# Altium PCB PCB1.PcbDoc
Units mm, origin at the board's own origin, x right, y up, seen from the top; angles counter-clockwise.
Board outline 51.76 x 42.26 mm, 4 copper layers (Top Layer, Int1 (GND), Int2 (PWR), Bottom Layer), stack 1.585 mm thick; 40 components, 26 nets, 171 pads, 124 vias.
Unrouted connection lines stored in the file: 1.
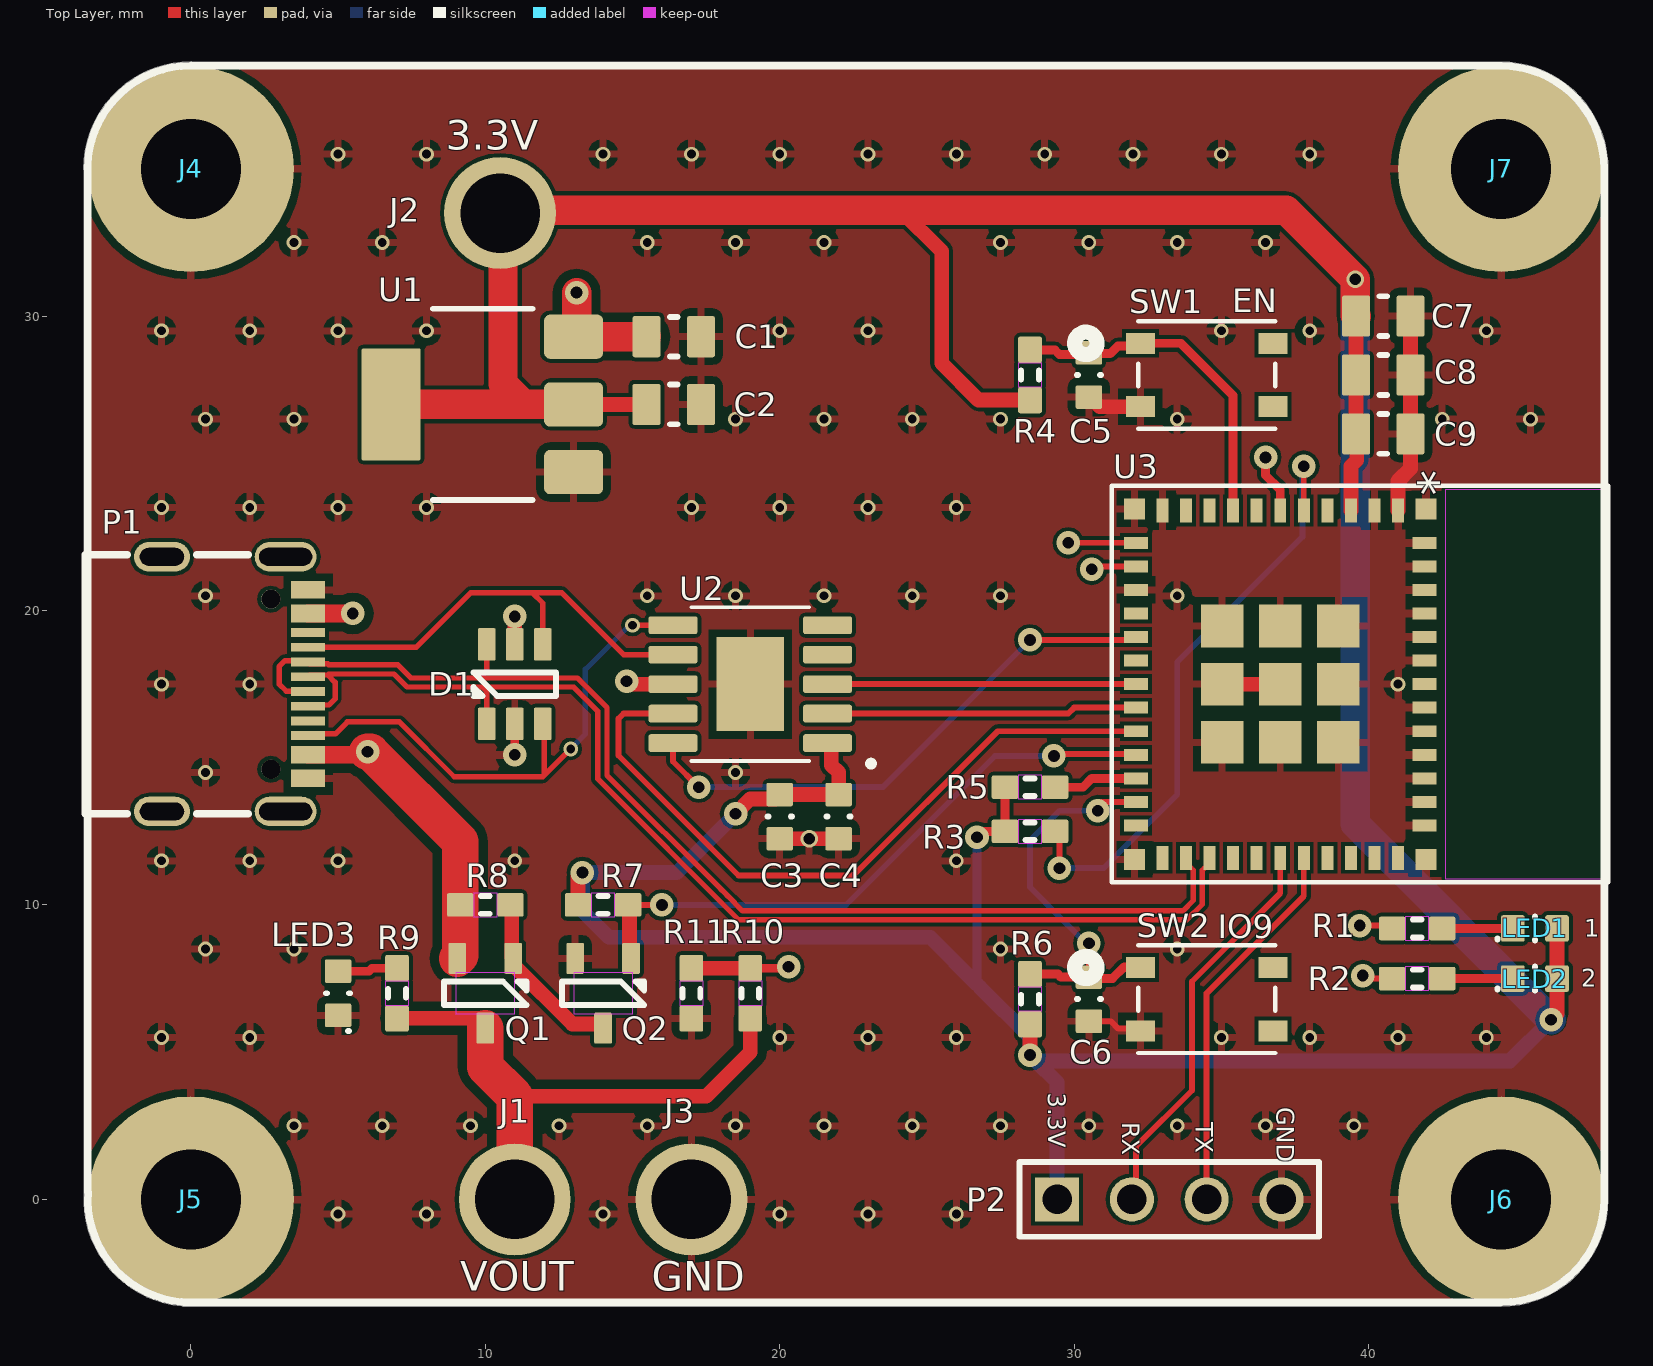
[diagram p0: Top Layer view]
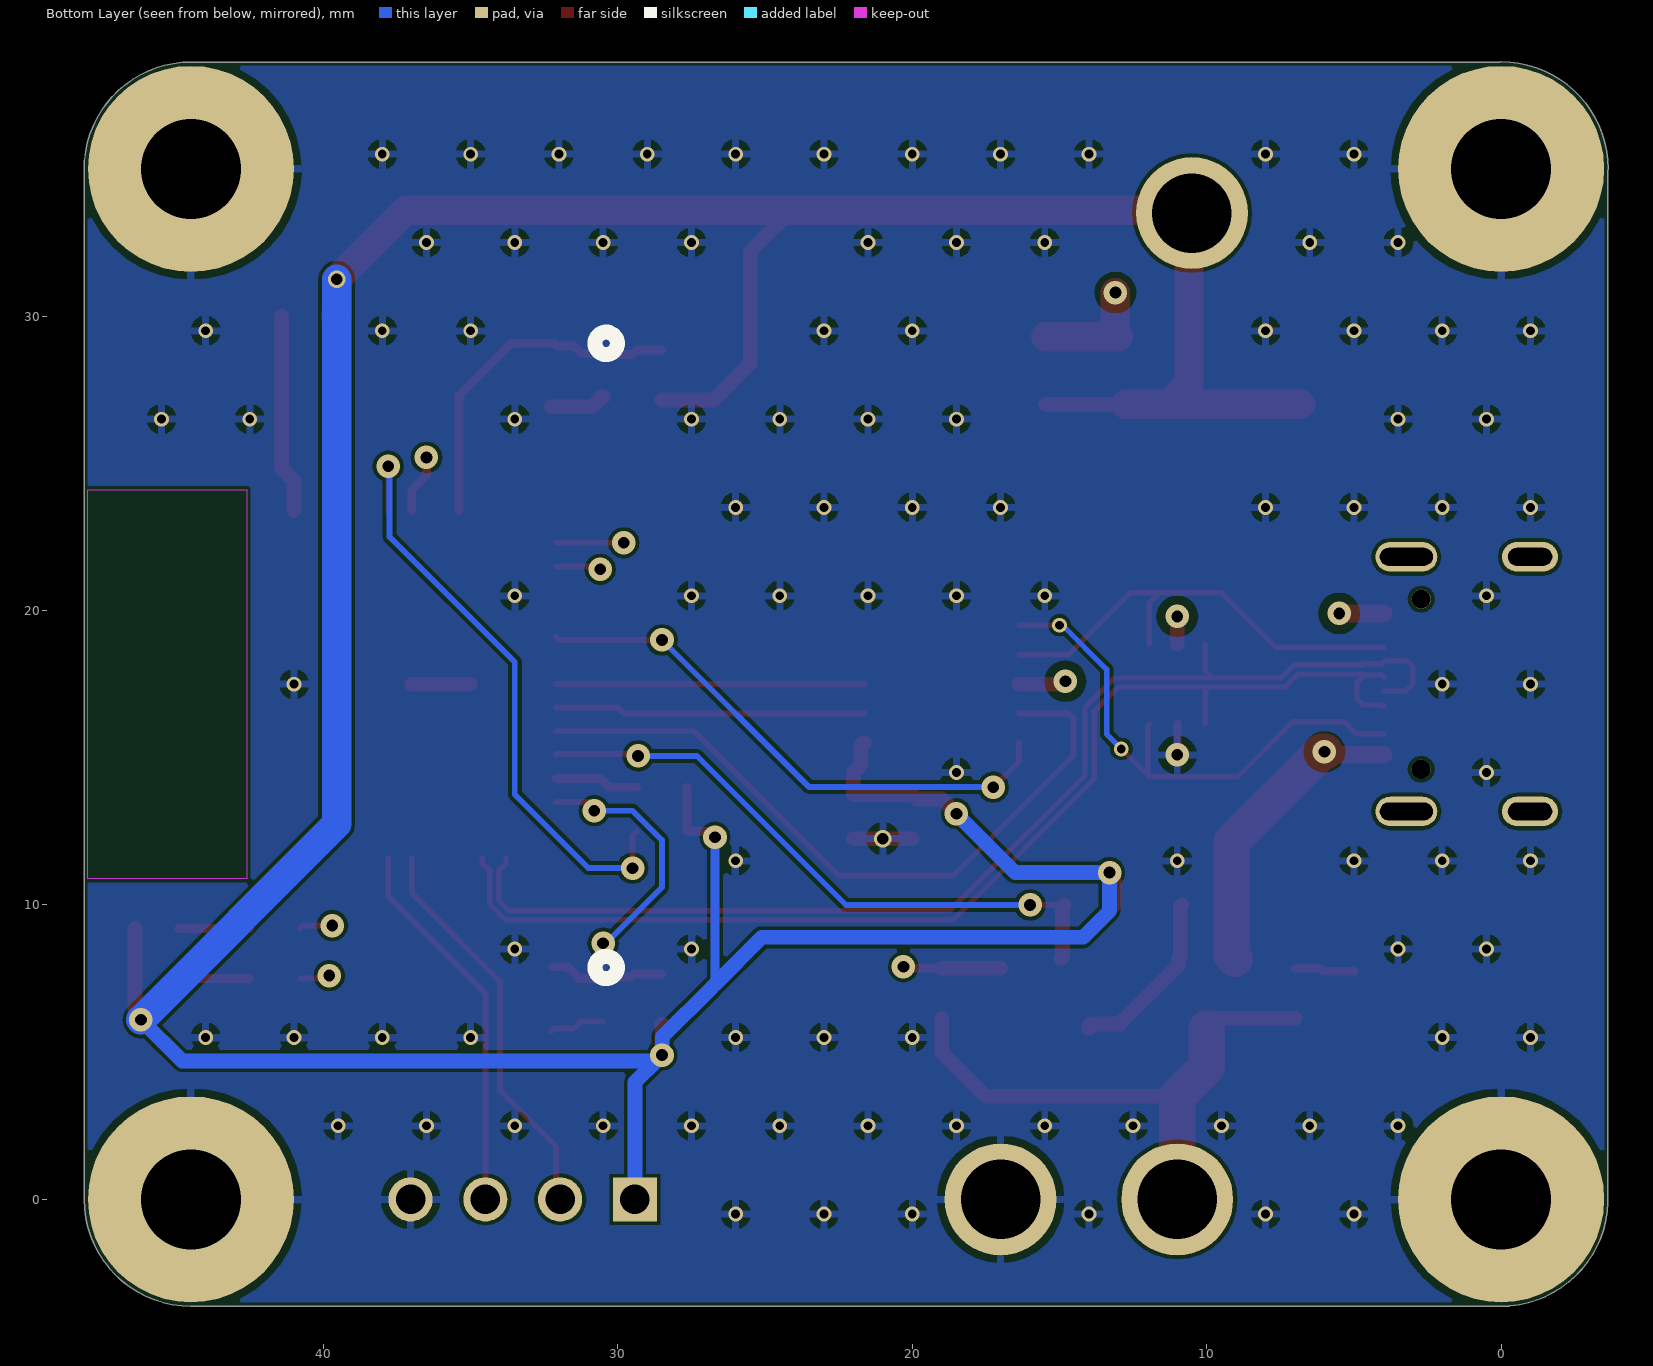
[diagram p1: Bottom Layer view, seen from below]
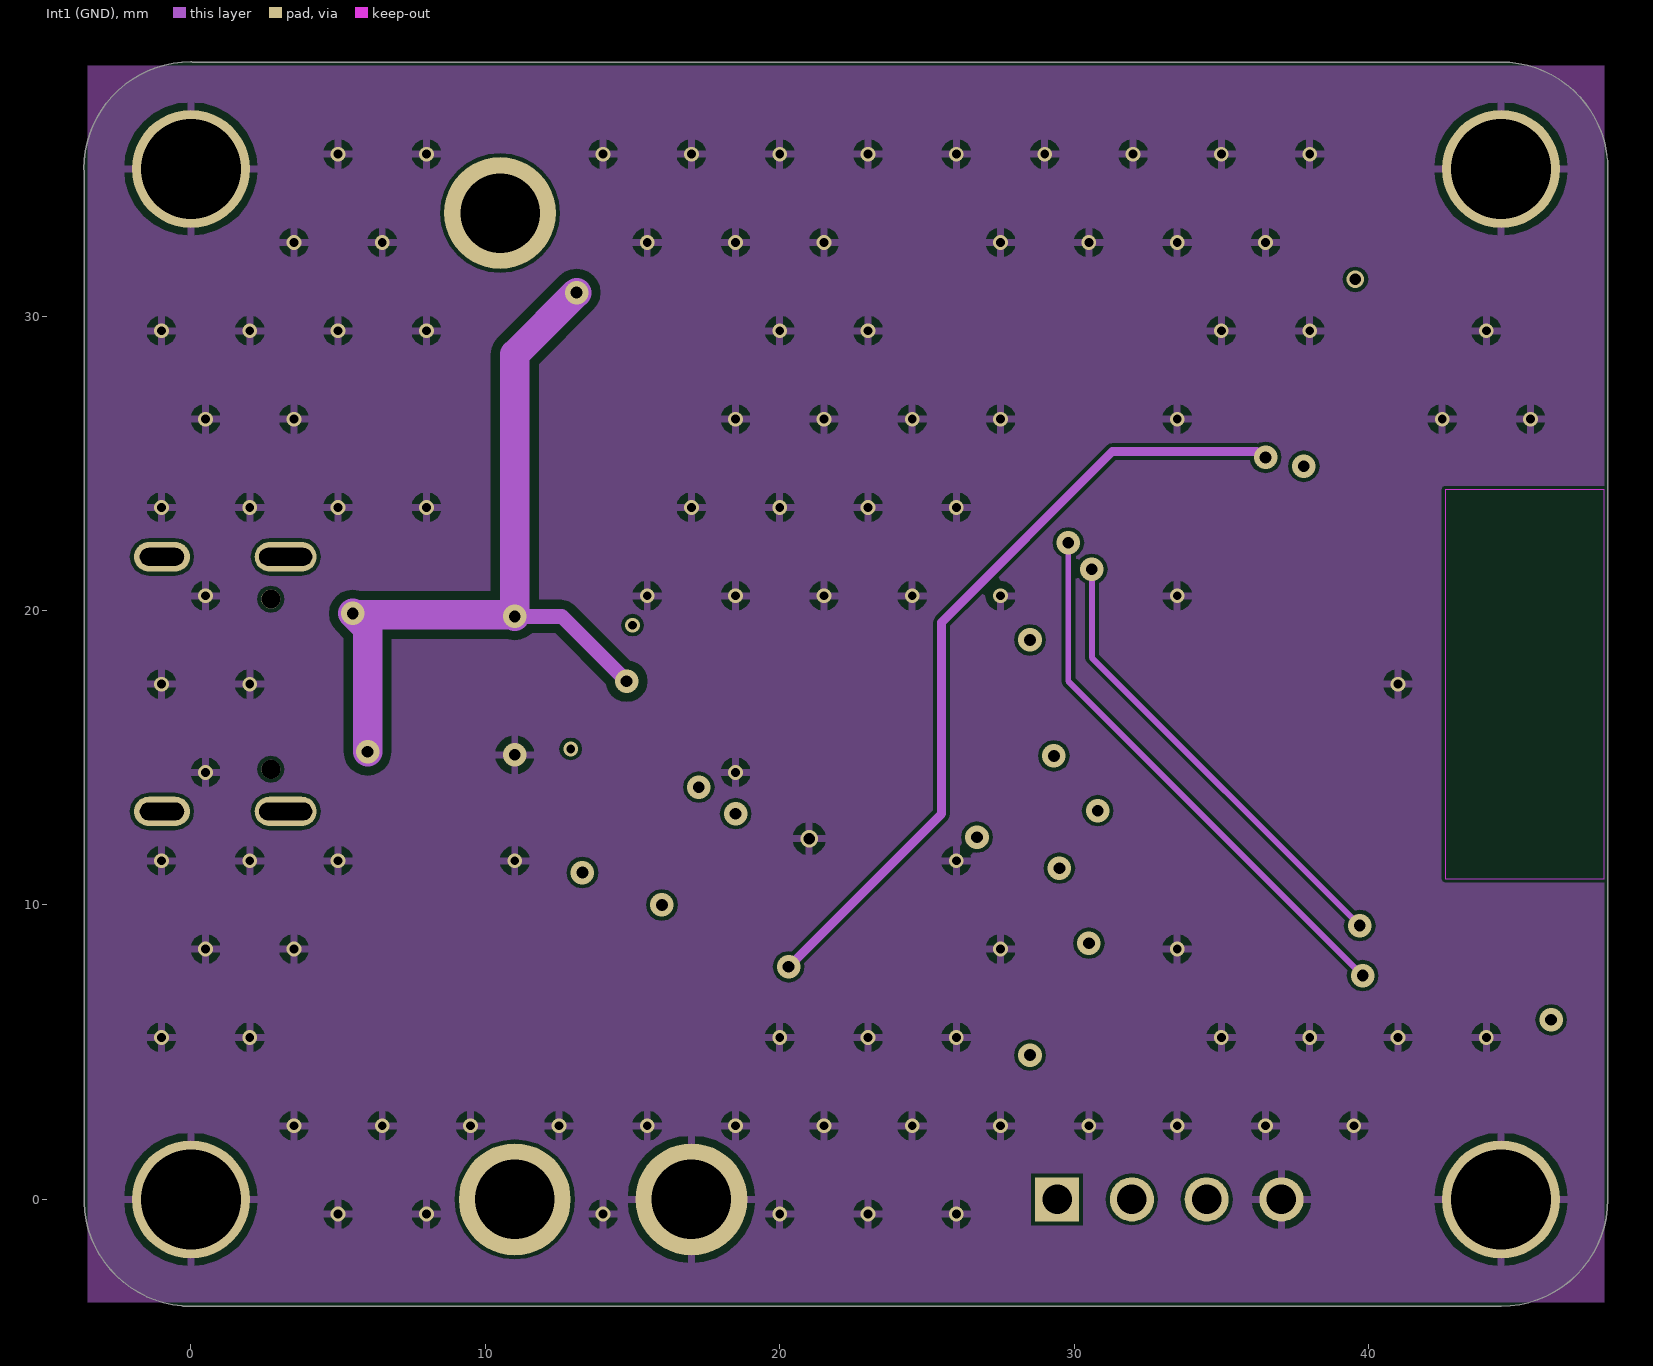
[diagram p2: Int1 (GND)]
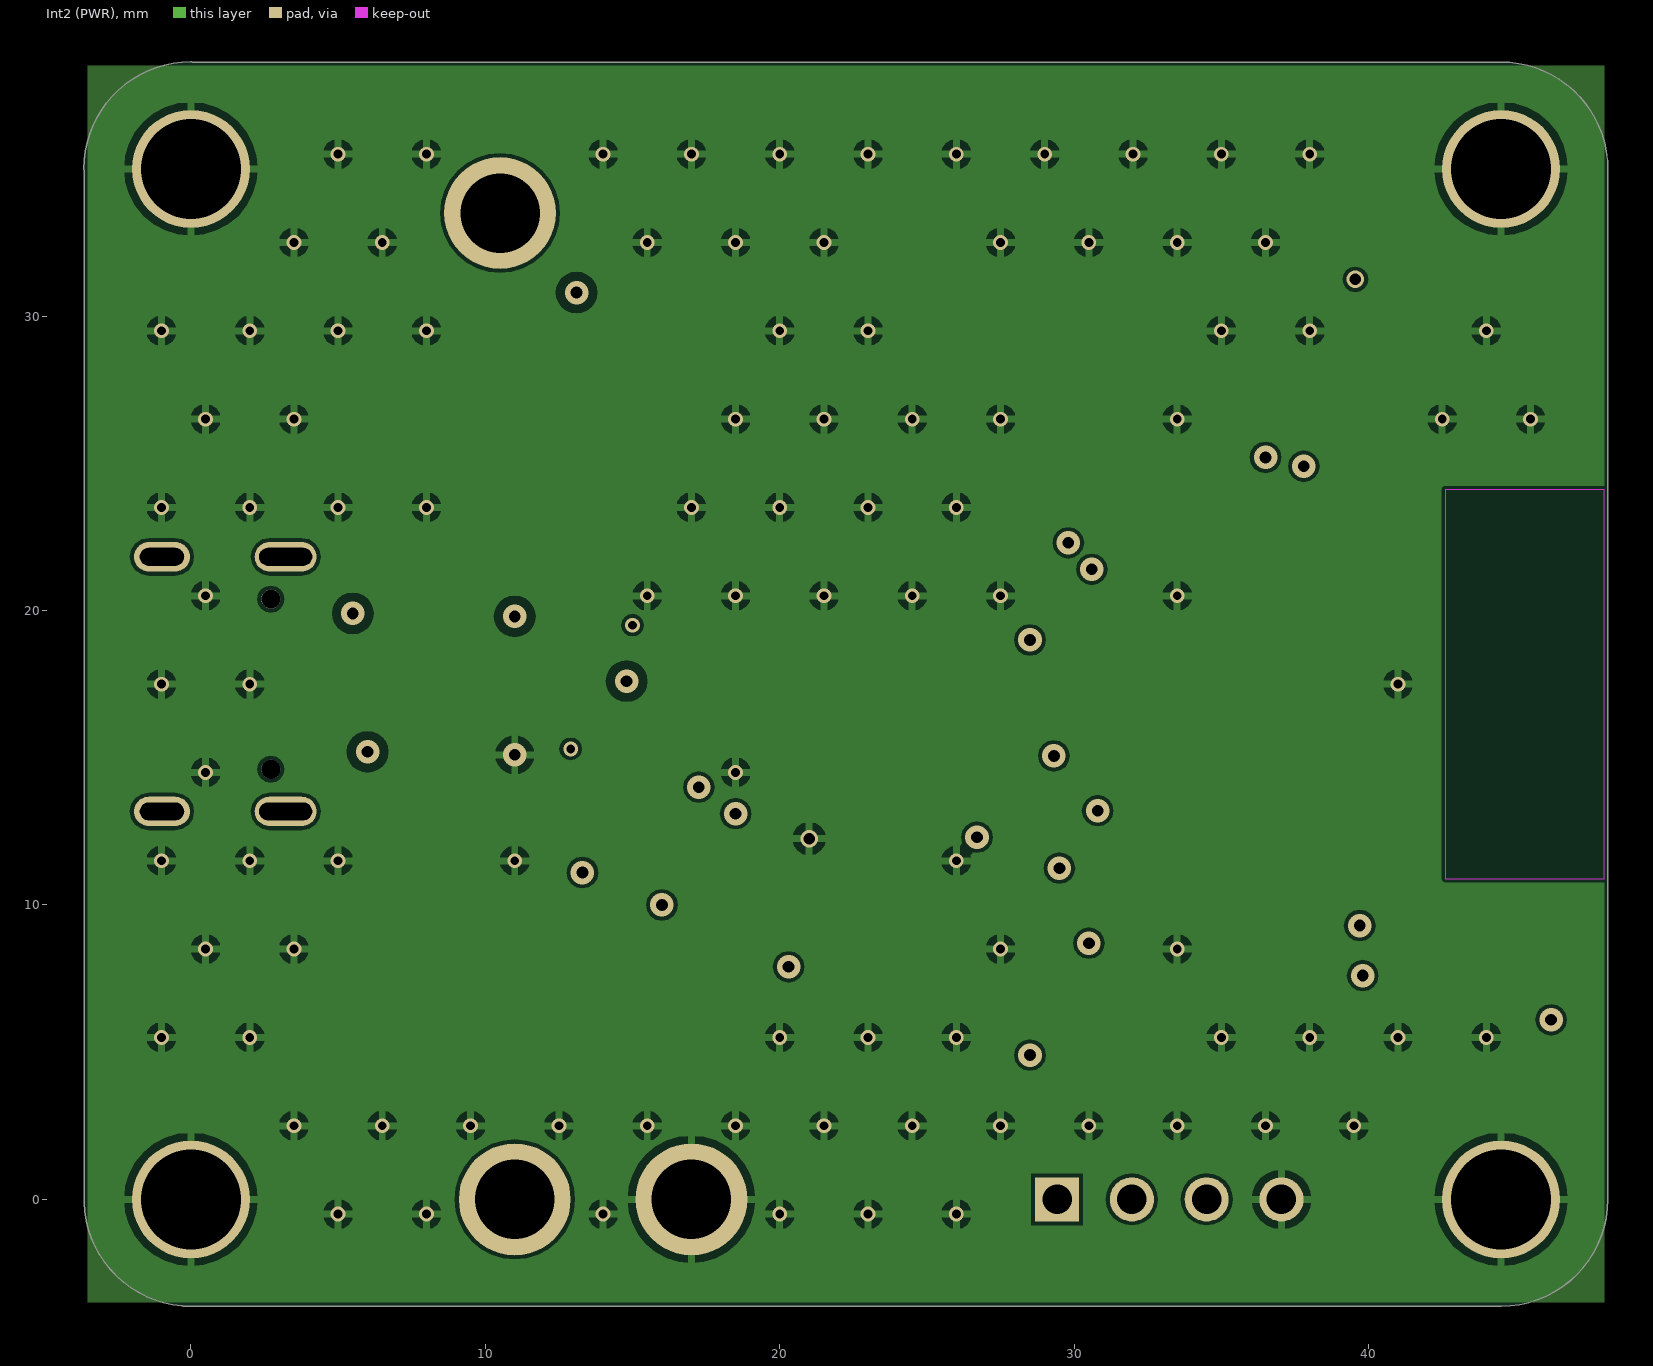
[diagram p3: Int2 (PWR)]
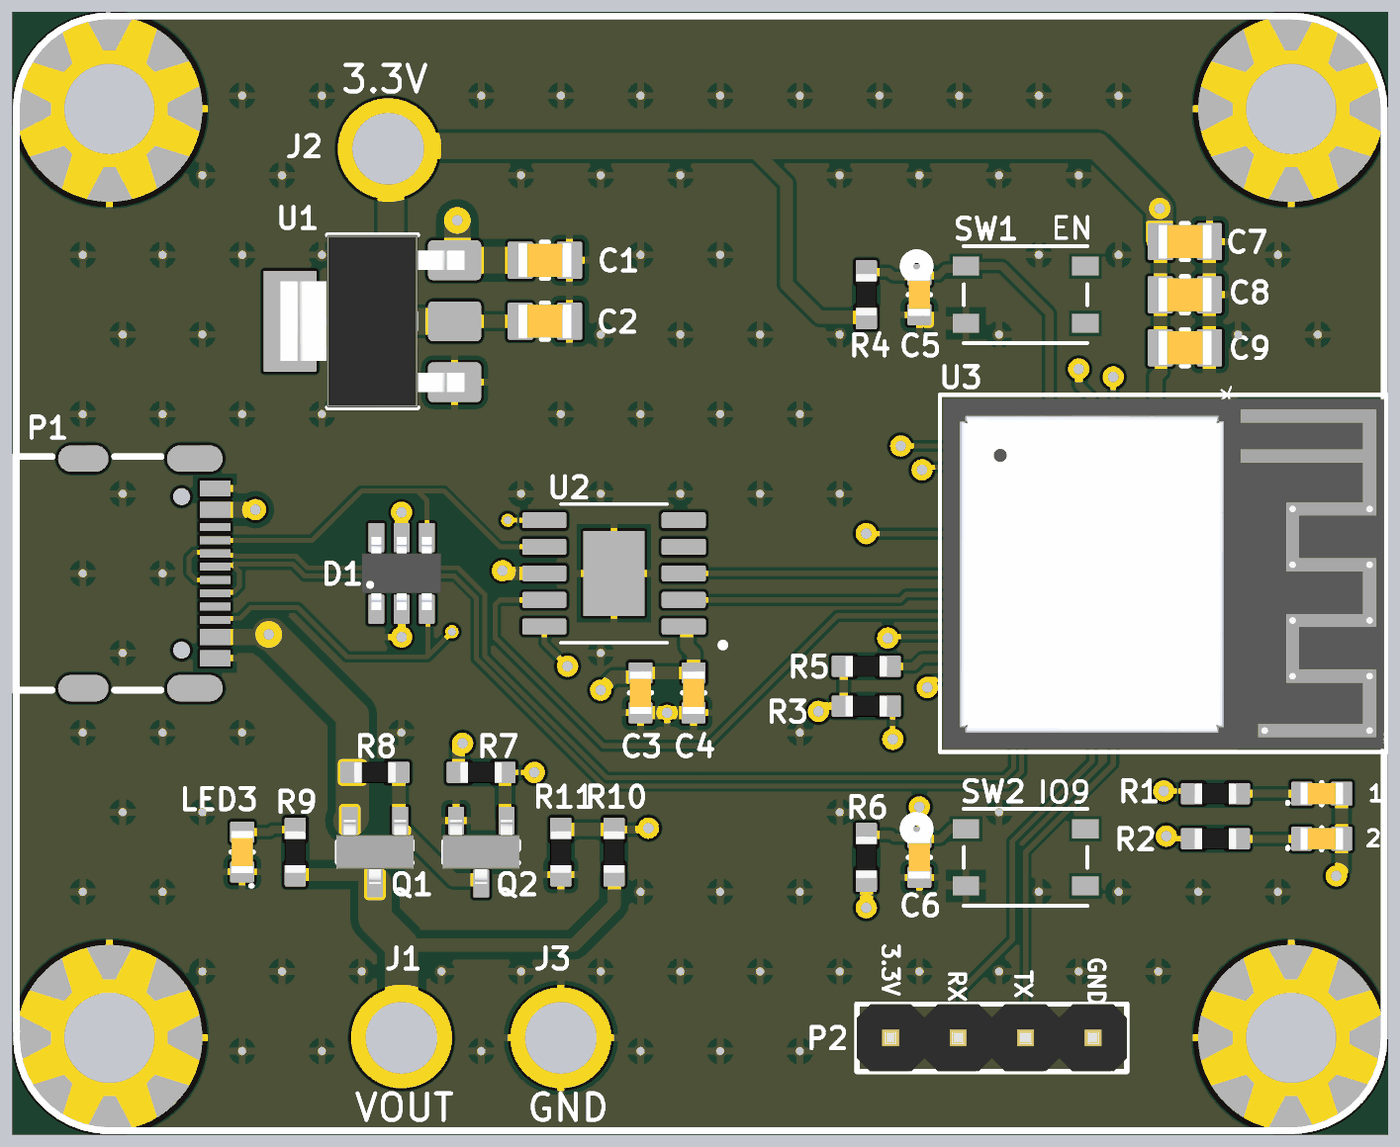
[diagram p4: 3D render of the assembled board from above, using the file's embedded part models]

## Layer stack, top to bottom
Top Solder: solder mask 0.035, SM-001, Dk 4
Top Layer: signal copper 0.035
Dielectric 2: prepreg 0.21, PP-017, Dk 4.6
Int1 (GND): signal copper 0.015
Dielectric 3: core 1.065, Core-039, Dk 4.6
Int2 (PWR): signal copper 0.015
Dielectric 4: prepreg 0.21, PP-017, Dk 4.6
Bottom Layer: signal copper 0.035
Bottom Solder: solder mask 0.035, SM-001, Dk 4

## Board outline
-0.306,-3.614 cw(c0,0) -3.621,0.21 cw(c-3.5,0.249) -3.627,0.249 -3.627,34.953 cw(c-3.509,35) -3.636,35 cw(c0,35) 0,38.636 cw(c0,38.509) 0.047,38.627 44.5,38.627 cw(c44.5,35) 48.127,35 cw(c48,35) 48.127,34.999 48.127,0.001 cw(c48,0) 48.127,0 cw(c44.5,0) 44.501,-3.627 cw(c44.5,0) 44.5,-3.627 ccw(c44.5,-3.5) 44.501,-3.627 44.5,-3.627 -0.25,-3.627 cw(c-0.25,-3.5)

## Design rules (kind name [scope] priority, off if disabled: settings)
Clearance Clearance_USB_C [InComponent('P1')] p1: gap=0.125 ignorepadtopadclearanceinfootprint=FALSE
Clearance Clearance_Power [InNetClass('Power')] p2: gap=0.3 ignorepadtopadclearanceinfootprint=FALSE except(0.127: SMDPad-SMDPad SMDPad-THPad SMDPad-Via SMDPad-Fill SMDPad-Poly SMDPad-Region SMDPad-Text SMDPad-Hole THPad-THPad THPad-Via THPad-Fill THPad-Poly THPad-Region THPad-Text THPad-Hole)
Clearance Clearance_signal [All] p3: gap=0.125 ignorepadtopadclearanceinfootprint=FALSE
ComponentClearance [All] p1 off: gap=0.254 collisioncheckmode=3 verticalgap=0.254 showdistances=FALSE
DiffPairsRouting [InDifferentialPair('USB')] p1: maxlimit=0.254 minlimit=0.125 mostfreqgap=0.254 toplayer_maxgap=0.127 toplayer_prefgap=0.127 toplayer_minwidth=0.182 toplayer_maxwidth=0.182 toplayer_prefwidth=0.182 bottomlayer_maxgap=0.127 bottomlayer_prefgap=0.127 bottomlayer_minwidth=0.182 bottomlayer_maxwidth=0.182 bottomlayer_prefwidth=0.182 impedanceprofiledriven=TRUE impedanceprofileid={35B3B325-3187-4826-BD4F-A59BFA412F1A} impedanceprofilevalue=90.000000 maxuncoupledlength=12.7
Height [All] p1 off: minheight=0 maxheight=25.4 prefheight=12.7
HoleSize [All] p1 off: absolutevalues=TRUE maxlimit=2.54 minlimit=0.025 maxpercent=80.000 minpercent=20.000
MinimumSolderMaskSliver [All] p1 off: minsoldermaskwidth=0.254
PasteMaskExpansion [All] p1 off: expansion=0
PolygonConnect PolygonConnect_Power [InNetClass('Power')] p1: connectstyle=Direct reliefconductorwidth=0.254 reliefentries=4 polygonreliefangle="90 Angle" airgapwidth=0.254
PolygonConnect [All] p2: connectstyle=Relief reliefconductorwidth=0.254 reliefentries=4 polygonreliefangle="90 Angle" airgapwidth=0.254
RoomDefinition sheet1 [InComponentClass('sheet1')] p1 off: confinementstyle=ConfineIn formatcopy=TRUE lockcomponents=FALSE outline 139,-14.5 300,-14.5 300,6.5 139,6.5
RoutingVias [All] p1: holewidth=0.3 width=0.5 viastyle="Through Hole" minholewidth=0.15 minwidth=0.25 maxholewidth=1 maxwidth=1.3
SilkToSilkClearance [All] p1 off: silktosilkclearance=0.254
SilkToSolderMaskClearance [IsPad] p1 off: minsilkscreentomaskgap=0.254 clearancetoexposedcopper=TRUE
SolderMaskExpansion [All] p1 off: expansion=0.102 istentingtop=FALSE
Width Width_Power(5A) [InNetClass('Power')] p1: maxlimit=2 minlimit=0.5 preferedwidth=1.25 minimp=50.000000 maximp=50.000000 favimp=50.000000
Width Width_signal [All] p2: maxlimit=1 minlimit=0.1 preferedwidth=0.2 minimp=50.000000 maximp=50.000000 favimp=50.000000
22 further rules are at their usual default settings.

## Classes and differential pairs
net class Power: NetJ1_1 VBUS
differential pair USB: +USB_P -USB_N

## Components (designator, comment, footprint, x,y, rotation, side; value= is the part's Value field where it differs from the comment)
C1 "Capacitor-0805-10uF-35V-X5R" CAPACITOR-0805 16.4,29.3 r180 top value=10uF
C2 "Capacitor-0805-10uF-35V-X5R" CAPACITOR-0805 16.4,27 r180 top value=10uF
C3 "Capacitor-0603-1uF-25V-X5R" CAPACITOR-0603 20,13 r90 top value=1uF
C4 "Capacitor-0603-0.1uF-50V-X7R" CAPACITOR-0603 22,13 r90 top value=0.1uF
C5 "Capacitor-0603-1uF-25V-X5R" CAPACITOR-0603 30.5,28 r90 top value=1uF
C6 "Capacitor-0603-1uF-25V-X5R" CAPACITOR-0603 30.5,6.8 r90 top value=1uF
C7 "Capacitor-0805-10uF-35V-X5R" CAPACITOR-0805 40.5,30 r180 top value=10uF
C8 "Capacitor-0805-10uF-35V-X5R" CAPACITOR-0805 40.5,28 r180 top value=10uF
C9 "Capacitor-0805-10uF-35V-X5R" CAPACITOR-0805 40.5,26 r180 top value=10uF
D1 "NUP4301MR6T1G" SOT-23-6 11,17.5 r0 top
J1 "hole" HOLE-2.70MM 11,0 r0 top
J2 "hole" HOLE-2.70MM 10.5,33.5 r0 top
J3 "hole" HOLE-2.70MM 17,0 r0 top
J4 "hole" HOLE-3.40MM-M3-7MMEYELET-MountingFeature 0,35 r0 top
J5 "hole" HOLE-3.40MM-M3-7MMEYELET-MountingFeature 0,0 r0 top
J6 "hole" HOLE-3.40MM-M3-7MMEYELET-MountingFeature 44.5,0 r0 top
J7 "hole" HOLE-3.40MM-M3-7MMEYELET-MountingFeature 44.5,35 r0 top
LED1 "B1911USD-20D000114U1930" LED-0603-2PIN 45.65,9.2 r0 top
LED2 "B1911USD-20D000114U1930" LED-0603-2PIN 45.65,7.5 r0 top
LED3 "B1911USD-20D000114U1930" LED-0603-2PIN 5,7 r90 top
P1 "USB-C" USB-C 1.5,17.5 r270 top
P2 "UART" HDR1X4 33.23,0 r0 top
Q1 "SSM3J332R" SOT-23-3 10,7 r180 top
Q2 "DMG3402L-7" SOT-23-3 14,7 r180 top
R1 "SMT resistor" Resistor-0603 41.65,9.2 r0 top value=1k
R2 "SMT resistor" Resistor-0603 41.65,7.5 r0 top value=1k
R3 "SMT resistor" Resistor-0603 28.5,12.5 r180 top value=10k
R4 "SMT resistor" Resistor-0603 28.5,28 r270 top value=10k
R5 "SMT resistor" Resistor-0603 28.5,14 r180 top value=10k
R6 "SMT resistor" Resistor-0603 28.5,6.8 r270 top value=10k
R7 "SMT resistor" Resistor-0603 14,10 r180 top value=10k
R8 "SMT resistor" Resistor-0603 10,10 r180 top value=10k
R9 "SMT resistor" Resistor-0603 7,7 r270 top value=1k
R10 "SMT resistor" Resistor-0603 19,7 r270 top value=10k
R11 "SMT resistor" Resistor-0603 17,7 r90 top value=1.69k
SW1 "PTS815 SJM 250 SMTR LFS" "SW4_PTS815 SJM 250 SMTR LFS_CNK" 34.5,28 r90 top
SW2 "PTS815 SJM 250 SMTR LFS" "SW4_PTS815 SJM 250 SMTR LFS_CNK" 34.5,6.8 r90 top
U1 "NCP1117ST15T3G" SOT-223-3/TO-261-3S 13,27 r90 top
U2 "CH224K" SOP10-PAD 19,17.5 r180 top
U3 "ESP32-C3-MINI-1-H4" ESP32-C3-MINI-1_EXP 39.705,17.5 r270 top

## Footprints (in the part's own frame and the unit in brackets; to place one, negate y for a bottom-side part, rotate by r counter-clockwise, add the part's x,y. Pads: shape width x height; smd on the part's side, far side on the other; paste and mask are expansions set on the pad)
CAPACITOR-0603 [mm] "Metric 1608, EIA 0603. Per Yageo Product Specification V2.2"
  rrect15% 0.8x0.9 smd: 1(-0.75,0) 2(0.75,0)
  Top Layer pour cut-out: -0.35,0.45 0.35,0.45 0.35,-0.45 -0.35,-0.45
  silkscreen extent 0,-0.41 0,0.41, body extent -0.93,-0.41 0.93,0.41, height 0.81
CAPACITOR-0805 [mm] "Metric 2012, EIA 0805, Per Yageo Product Specification V2.2"
  rrect15% 0.95x1.4 smd: 1(-0.925,0) 2(0.925,0)
  silkscreen extent -0.13,-0.67 0.13,0.67, body extent -1.09,-0.64 1.09,0.64, height 1.26
ESP32-C3-MINI-1_EXP [mil]
  rect 32x16 smd paste+0 mask+0: 1(-232.28,50.98) 2(-232.28,19.48) 3(-232.28,-12.01) 4(-232.28,-43.51) 5(-232.28,-75) 6(-232.28,-106.5) 7(-232.28,-138) 8(-232.28,-169.49) 9(-232.28,-200.99) 10(-232.28,-232.48) 11(-232.28,-263.98) 25(232.28,-263.98) 26(232.28,-232.48) 27(232.28,-200.99) 28(232.28,-169.49) 29(232.28,-138) 30(232.28,-106.5) 31(232.28,-75) 32(232.28,-43.51) 33(232.28,-12.01) 34(232.28,19.48) 35(232.28,50.98)
  rect 16x32 smd paste+0 mask+0: 12(-188.98,-299.41) 13(-157.48,-299.41) 14(-125.98,-299.41) 15(-94.49,-299.41) 16(-62.99,-299.41) 17(-31.5,-299.41) 18(0,-299.41) 19(31.5,-299.41) 20(62.99,-299.41) 21(94.49,-299.41) 22(125.98,-299.41) 23(157.48,-299.41) 24(188.98,-299.41) 36(188.98,86.41) 37(157.48,86.41) 38(125.98,86.41) 39(94.49,86.41) 40(62.99,86.41) 41(31.5,86.41) 42(0,86.41) 43(-31.5,86.41) 44(-62.99,86.41) 45(-94.49,86.41) 46(-125.98,86.41) 47(-157.48,86.41) 48(-188.98,86.41)
  rect 57x57 smd: 49(0,-106.5) 54(77.76,-28.74) 55(77.76,-106.5) 56(77.76,-184.26) 57(0,-184.26) 58(-77.76,-184.26) 59(-77.76,-106.5) 60(-77.76,-28.74) 61(0,-28.74)
  rect 28x28 smd: 50(234.25,88.38) 51(234.25,-301.38) 52(-234.25,-301.38) 53(-234.25,88.38)
  Keep-Out Layer region: 260,327 -260,327 -260,114 260,114
  silkscreen extent -265,-332 265,332, body extent -259,-327 261,327, height 100
HDR1X4 [mm] "Connector; Header; 2 Position"
  rect 1.5x1.5 hole 1: 1(-3.81,0)
  round 1.5 hole 1: 2(-1.27,0) 3(1.27,0) 4(3.81,0)
  silkscreen extent -5.08,-1.27 5.08,1.27, body extent -5.08,-1.27 5.08,1.27, height 8.54
HOLE-2.70MM [mm] "Hole 2.70mm"
  round 3.8 hole 2.7: 1(0,0)
HOLE-3.40MM-M3-7MMEYELET-MountingFeature [mm] "Hole 3.40mm with round pad for eyelet"
  round 7 / inner round 4 / far side round 7 hole 3.4 mask+0.2: 1(0,0)
LED-0603-2PIN [mm] "Metric 1608, EIA 0603. Per Yageo Product Specification V2.2"
  rrect15% 0.8x0.9 smd: 1(-0.75,0) 2(0.75,0)
  Top Layer pour cut-out: -0.35,0.45 0.35,0.45 0.35,-0.45 -0.35,-0.45
  silkscreen extent -1.28,-0.41 0,0.41, body extent -0.93,-0.41 0.93,0.41, height 0.81
Resistor-0603 [mm] "Metric 1608, EIA 0603 Drawn per Yageo \"Chip resistors Mounting\" rev 10"
  rrect15% 0.9x0.8 smd: 1(-0.85,0) 2(0.85,0)
  Top Layer pour cut-out: -0.4,0.4 0.4,0.4 0.4,-0.4 -0.4,-0.4
  Top Layer keep-out region: -0.4,-0.4 0.4,-0.4 0.4,0.4 -0.4,0.4
  silkscreen extent -0.15,-0.3 0.15,0.3, body extent -0.8,-0.4 0.8,0.4, height 0.55
SOP10-PAD [mm]
  rrect25% 1.66x0.6 smd: 1(-2.625,2) 2(-2.625,1) 3(-2.625,0) 4(-2.625,-1) 5(-2.625,-2) 6(2.625,-2) 7(2.625,-1) 8(2.625,0) 9(2.625,1) 10(2.625,2)
  rect 2.3x3.2 smd: PAD(0,0)
  silkscreen extent -4.2,-2.61 2,2.8
SOT-23-3 [mm] "SOT23-3, from TI DBZ (R-PDSO-G3)"
  rrect15% 0.6x1.05 smd: 1(-0.95,-1.185) 2(0.95,-1.185) 3(0,1.185)
  Top Layer keep-out region: -1,-0.7 1,-0.7 1,0.7 -1,0.7
  silkscreen extent -1.4,-0.4 1.4,0.4, body extent -1.45,-1.21 1.45,1.21, height 0.98
SOT-23-6 [mm] "SOT23-6, from TI DDC (R-PDSO-G6)"
  rrect15% 0.6x1.1 smd: 1(-0.95,-1.35) 2(0,-1.35) 3(0.95,-1.35) 4(0.95,1.35) 5(0,1.35) 6(-0.95,1.35)
  silkscreen extent -1.4,-0.4 1.4,0.4, body extent -1.5,-1.37 1.5,1.38, height 1.1
SOT-223-3/TO-261-3S [mm] "TO-261-3 / SOT-223-3 from Infineon IPN80R600P7 Datasheet, rev 2,1"
  rrect25% 1.5x2 smd: 1(-2.3,0) 2(0,0) 3(2.3,0)
  rrect5% 3.8x2 smd: 4(0,6.2)
  silkscreen extent -3.25,1.4 3.25,4.78, body extent -3.25,-0.37 3.25,6.57, height 1.64
"SW4_PTS815 SJM 250 SMTR LFS_CNK" [mm]
  rect 0.711x0.991 smd paste+0 mask+0: 1(1.075,2.25) 2(1.075,-2.25) 3(-1.075,2.25) 4(-1.075,-2.25)
  silkscreen extent -1.83,-2.32 1.83,4.48, body extent 0,-0.25 0.25,0, height 0.25
USB-C [mm]
  oval 1x2.1 hole 0.6 slot 1.8 at 90 deg: 13(-4.325,1.719) 14(4.325,1.719)
  oval 1x1.9 hole 0.6 slot 1.5 at 90 deg: 15(-4.325,-2.481) 16(4.325,-2.481)
  rect 0.6x1.15 smd: A1B12(-3.2,2.481) A4B9(-2.4,2.481) B1A12(3.2,2.481) B4A9(2.4,2.481)
  rect 0.3x1.15 smd: A5(-1.25,2.481) A6(-0.25,2.481) A7(0.25,2.481) A8(1.25,2.481) B5(1.75,2.481) B6(0.75,2.481) B7(-0.75,2.481) B8(-1.75,2.481)
  round 0.65 hole 0.65 unplated: ""(-2.89,1.219) ""(2.89,1.219)
  silkscreen extent -4.4,-5.08 4.4,0.44

## Part data
C1 C2 C7 C8 C9: Package / Case="Metric 2012 , EIA 0805", Supplier Part Number 1=490-10515-1-ND, Volt=35V, Mounted=Yes, Precision=X5R-10%, Supplier 1=Digi-Key, Supplier 2=Digi-Key, Supplier 3=Digi-Key, Supplier 4=Digi-Key
C3 C5 C6: Package / Case="Metric 1608, EIA 0603", Supplier Part Number 1=1276-1859-2-ND, Volt=25V, Mounted=Yes, Precision=X5R-10%, Supplier 1=Digi-Key, Supplier 2=Digi-Key, Supplier 3=Digi-Key, Supplier 4=Digi-Key, Supplier Part Number 2=1276-1942-2-ND
C4: Package / Case="Metric 1608, EIA 0603", Supplier Part Number 1=1276-1935-2-ND, Volt=50V, Mounted=Yes, Precision=X7R-10%, Supplier 1=Digi-Key, Supplier 2=Digi-Key, Supplier 3=Digi-Key, Supplier 4=Digi-Key, Supplier Part Number 2=1276-1934-2-ND
D1: "4CH Clamp Ipp Tvs Diode Surface Mount SOT23-6 (SC74)", Package / Case=SOT23-6, Supplier Part Number 1=NUP4301MR6T1GOSTR-ND, Volt=70, Mounted=Yes, Supplier 1=Digi-Key
J1 J2 J3: library part "Hole 2.70mm AWG12-Stranded", "Hole for 12 AWG Stranded Wire", Mounted=N/A
J4 J5 J6 J7: library part "Hole 3.40mm M3-MountingFeature", "Hole for M3 Bolt with 7mm pad", Mounted=N/A
LED1 LED2 LED3: "LED RED CLEAR 1608 SMD", Package / Case="0603 (1608 Metric)", Supplier Part Number 1=3147-B1911USD-20D000114U1930CT-ND, Mounted=Yes, Supplier 1=Digi-Key
P1: "TYPEC-304J-BCP16 / 5A USB 3.1 1 Type-C SMD USB Connectors", Package / Case=SMD, Supplier Part Number 1=TYPEC-304J-BCP16, Volt=N/A, Mounted=Yes, Supplier 1=LCSC
P2: library part 4pos-TH-2.54mm, "4pos TH 2.54mm Header", Package / Case=TH, Supplier Part Number 1=N/A, Mounted=Yes, Supplier 1=Digi-Key, Volt=N/A
Q1: "P-Channel 30 V 6A (Ta) 1W (Ta) Surface Mount SOT-23F", Current=6A, Package / Case=SOT-523, Supplier Part Number 1=SSM3J332RLFCT-ND, Volt=30V, Mounted=Yes, Supplier 1=Digi-Key
Q2: "N-Channel 30 V 4A (Ta) 1.4W (Ta) Surface Mount SOT-23-3", Current=4A, Package / Case=SOT-23-3, Supplier Part Number 1=DMG3402L-7DICT-ND, Volt=30V, Mounted=Yes, Supplier 1=Digi-Key
R1 R2 R9: library part Resistor0603-1k, "Resistor0603-1k", Package / Case="Metric 1608, EIA 0603", Supplier Part Number 1=RMCF0603FT1K00TR-ND, Mounted=Yes, Precision=1%, Supplier 1=Digi-Key, Supplier 2=Digi-Key, Supplier 3=Digi-Key, Supplier 4=Digi-Key, Supplier Part Number 2=311-1.00KHRTR-ND, Supplier Part Number 3=AG1307TR-ND, Watt=0.1W
R3 R4 R5 R6 R7 R8 R10: library part Resistor0603-10k, "Resistor0603-10k", Package / Case="Metric 1608, EIA 0603", Supplier Part Number 1=311-10.0KHRTR-ND, Mounted=Yes, Precision=1%, Supplier 1=Digi-Key, Supplier 2=Digi-Key, Supplier 3=Digi-Key, Supplier 4=Digi-Key, Supplier Part Number 2=RMCF0603FT10K0TR-ND, Watt=0.1W
R11: library part Resistor0603-1.69k, "Resistor0603-1.69k", Package / Case="Metric 1608, EIA 0603", Supplier Part Number 1=RMCF0603FT1K69CT-ND, Mounted=Yes, Precision=1%, Supplier 1=Digi-Key, Supplier 2=Digi-Key, Supplier 3=Digi-Key, Supplier 4=Digi-Key, Watt=0.25W
SW1 SW2: "TACT 4.2 X 3.2, 2.5 MM H, 180GF,", Current=0.05A, Supplier Part Number 1=CKN12215-1-ND, Volt=12V, Mounted=Yes, Supplier 1=Digi-Key
U1: "IC REG LINEAR 3.3V 1A SOT223", Package / Case=SOT223, Supplier Part Number 1=NCV1117ST33T3GOSCT-ND, Mounted=Yes, Supplier 1=Digi-Key
U2: "IC USB-PD Controller  / ESSOP-10", Package / Case=ESSOP-10, Supplier Part Number 1=C970725, Grade=None, Mounted=Yes, Supplier 1=LCSC
U3: library part ESP32-C3-MINI-1-N4, "Bluetooth, WiFi 802.11b/g/n, Bluetooth v5.0 Transceiver Module 2.412GHz ~ 2.484GHz PCB Trace Surface Mount", Mfr_Name="Espressif Systems", Copyright="Copyright (C) 2023 Ultra Librarian. All rights reserved.", Datasheet=https://www.espressif.com/sites/default/files/documentation/esp32-c3-mini-1_datasheet_en.pdf, Manufacturer_Part_Number=ESP32-C3-MINI-1-N4, RefDes=RefDes, Type=Type

## Via types
v1: diameter 0.5, hole 0.3, Top Layer to Bottom Layer, tented both sides, 95 vias
v2: diameter 0.8, hole 0.4, Top Layer to Bottom Layer, 25 vias
v3: diameter 0.6, hole 0.4, Top Layer to Bottom Layer, 2 vias
v4: diameter 0.5, hole 0.3, Top Layer to Bottom Layer, 2 vias

## Nets (pads, with @x,y where several pads share a name; then routed paths per layer and width w, separated by ;. In a path a pad name is that pad's centre, name@x,y a point inside that pad or via, vN(x,y) a via of type N, cw(c..) or ccw(c..) an arc to the next point about the centre after c; other vN are vias at no path point)
+3.3: C2.2 C3.2 C4.2 C7.2 C8.2 C9.2 J2.1 LED1.2 LED2.2 P2.1 R3.2 R4.2 R5.2 R6.2 R7.2 U1.2 U1.4 U2.1 U3.3 | length 157.4
  Top Layer w0.3: v2(26.7,12.3) 26.9,12.5 R3.2 R5.2
  Top Layer w0.5: J2.1 J2.1@10.6,33.4 ; U1.2@12.75,27 C2.2 ; R7.2 13.15,10.95 v2(13.3,11.1) ; v2(18.5,13.1) 19,13.6 19.85,13.6 C3.2 C4.2 22,14.5 21.75,14.75 21.75,15.45 21.7,15.5 U2.1 ; 24.1,33.6 25.5,32.2 25.5,28.4 26.75,27.15 R4.2 ; v2(28.5,4.9) R6.2 ; U3.3 39.4,24.9 39.6,25.1 39.6,25.975 C9.2 C8.2 C7.2 ; v2@46.4,6.3 LED2.2 LED1.2
  Top Layer w1: U1.4 11.3,27 ; J2.1 10.6,33.6 24.1,33.6 37.2,33.6 v3(39.55,31.25) 39.55,30.025 C7.2 ; J2.1@10.6,33.4 10.6,27.7 11.3,27 ; U1.2@12.75,27 11.3,27
  Bottom Layer w0.3: v2(26.7,12.3) 26.7,7.307 26.799,7.208
  Bottom Layer w0.5: v2(18.5,13.1) 16.5,11.1 v2(13.3,11.1) 13.3,9.8 14.2,8.9 25.107,8.9 26.7,7.307 ; 26.799,7.208 28.49,5.517 28.49,4.91 v2(28.5,4.9) v2@28.7,4.7 ; P2.1 29.42,3.98 v2@28.7,4.7 ; v2(46.2,6.1) 44.8,4.7 v2@28.7,4.7
  Bottom Layer w1: v3(39.55,31.25) 39.55,12.75 v2(46.2,6.1)
CC1: D1.4 P1.A5 U2.7 | length 15.9
  Top Layer w0.182: P1.A5 7.65,18.75 9.5,20.6 11.6,20.6 ; D1.4 11.95,20.25 11.6,20.6 ; U2.7 14.7,18.5 12.6,20.6 11.6,20.6
CC2: D1.3 P1.B5 U2.6 | length 18.5
  Top Layer w0.182: P1.B5@3.981,15.791 3.999,15.809 4.909,15.809 5.316,16.216 7.084,16.216 8.945,14.355 11.955,14.355 12,14.4 ; D1.3 12,16.1 12,14.4 ; v4(12.9,15.3) 12,14.4 ; v4(15,19.5) U2.6
  Bottom Layer w0.182: v4(12.9,15.3) 13.4,15.8 13.4,18 14.9,19.5 v4(15,19.5)
CFG1: U2.9 U3.20 | length 24.5
  Top Layer w0.2: U2.9 14.7,16.5 14.527,16.327 14.527,15.073 18.6,11 22.5,11 27.4,15.9 U3.20
CFG2: U2.2 U3.19 | length 10.6
  Top Layer w0.2: U2.2 29.8,16.5 30,16.7 U3.19
CFG3: U2.3 U3.18 | length 10.5
  Top Layer w0.2: U2.3 U3.18
EN: C5.2 R4.1 SW1.1 U3.8 | length 11.7
  Top Layer w0.3: R4.1 29.35,28.85 29.5,28.7 30.45,28.7 C5.2 30.526,28.724 31.224,28.724 31.48,28.98 32.055,28.98 SW1.1@32.15,29.075 ; SW1.1 33.625,29.075 35.4,27.3 U3.8
EN_PWR: Q2.1 R7.1 U3.21 | length 21.2
  Top Layer w0.2: R7.1 v2(16,10) ; v2(29.312,15.062) 29.373,15.123 32.077,15.123 U3.21
  Top Layer w0.5: R7.1 14.9,9.95 14.9,8.235 Q2.1
  Bottom Layer w0.2: v2(16,10) 22.25,10 27.312,15.062 v2(29.312,15.062)
GND: C1.1 C2.1 C3.1 C4.1 C5.1 C6.1 C7.1 C8.1 C9.1 D1.2 J3.1 J4.1 J5.1 J6.1 J7.1 LED3.1 P1.A1B12 P1.B1A12 P2.4 Q2.2 R11.1 SW1.3 SW2.3 U1.1 U2.PAD U3.1 U3.2 U3.11 U3.14 U3.36 U3.37 U3.38 U3.39 U3.40 U3.41 U3.42 U3.43 U3.44 U3.45 U3.46 U3.47 U3.48 U3.49 U3.50 U3.51 U3.52 U3.53 U3.54 U3.55 U3.56 U3.57 U3.58 U3.59 U3.60 U3.61 | length 15.6
  Top Layer w0.2: C6.1 31.25,6.05 31.5,5.8 32.175,5.8 SW2.3
  Top Layer w0.3: v2(11,15.1) D1.2
  Top Layer w0.5: C3.1 v3(21,12.25) C4.1 ; C5.1 30.55,27.25 30.875,26.925 SW1.3 ; U3.57 U3.49 ; U3.1 41,24.4 41.425,24.825 C9.1 C8.1 C7.1
  other v1: 5,-0.5 8,-0.5 14,-0.5 20,-0.5 23,-0.5 26,-0.5 3.5,2.5 6.5,2.5 9.5,2.5 12.5,2.5 15.5,2.5 18.5,2.5 21.5,2.5 24.5,2.5 27.5,2.5 30.5,2.5 33.5,2.5 36.5,2.5 39.5,2.5 -1,5.5 2,5.5 20,5.5 23,5.5 26,5.5 35,5.5 38,5.5 41,5.5 44,5.5 0.5,8.5 3.5,8.5 27.5,8.5 33.5,8.5 -1,11.5 2,11.5 5,11.5 11,11.5 26,11.5 0.5,14.5 18.5,14.5 -1,17.5 2,17.5 41,17.5 0.5,20.5 15.5,20.5 18.5,20.5 21.5,20.5 24.5,20.5 27.5,20.5 33.5,20.5 -1,23.5 2,23.5 5,23.5 8,23.5 17,23.5 20,23.5 23,23.5 26,23.5 0.5,26.5 3.5,26.5 18.5,26.5 21.5,26.5 24.5,26.5 27.5,26.5 33.5,26.5 42.5,26.5 45.5,26.5 -1,29.5 2,29.5 5,29.5 8,29.5 20,29.5 23,29.5 35,29.5 38,29.5 44,29.5 3.5,32.5 6.5,32.5 15.5,32.5 18.5,32.5 21.5,32.5 27.5,32.5 30.5,32.5 33.5,32.5 36.5,32.5 5,35.5 8,35.5 14,35.5 17,35.5 20,35.5 23,35.5 26,35.5 29,35.5 32,35.5 35,35.5 38,35.5
IO9: C6.2 R6.1 SW2.1 U3.23 | length 13.7
  Top Layer w0.2: C6.2 v2@30.5,8.6 ; v2(30.8,13.2) 30.867,13.267 30.867,13.5 U3.23
  Top Layer w0.3: R6.1 29.45,7.65 29.55,7.55 C6.2 30.55,7.5 31.3,7.5 31.7,7.9 31.725,7.9 ; 31.75,7.875 31.725,7.9 ; SW2.1@32.225,7.9 31.725,7.9
  Bottom Layer w0.2: v2(30.5,8.7) 30.4,8.7 28.5,10.6 28.5,12.2 29.5,13.2 v2(30.8,13.2)
NetJ1_1: J1.1 Q1.3 R9.2 R10.2 | length 19.3
  Top Layer w0.5: R9.2 9.89,6.15 10,6.04 Q1.3 ; 11,3.5 17.5,3.5 19,5 R10.2
  Top Layer w1.25: Q1.3 10,4.5 11,3.5 J1.1
NetLED1_1: LED1.1 R1.2 | length 2.4
  Top Layer w0.3: R1.2 LED1.1
NetLED2_1: LED2.1 R2.2 | length 2.4
  Top Layer w0.3: R2.2 LED2.1
NetLED3_2: LED3.2 R9.1 | length 2
  Top Layer w0.3: LED3.2 6.05,7.75 6.15,7.85 R9.1
NetP2_2: P2.2 U3.30 | length 13.7
  Top Layer w0.2: P2.2 32.1,0.14 32.1,1.8 34,3.7 34,7.4 37,10.4 U3.30
NetP2_3: P2.3 U3.31 | length 13
  Top Layer w0.2: P2.3 34.5,7 37.8,10.3 U3.31
NetQ1_1: Q1.1 Q2.3 R8.1 | length 6.1
  Top Layer w0.5: R8.1 10.9,9.95 10.9,8.235 Q1.1 10.95,7.96 12.95,5.96 13.95,5.96 14,5.91 Q2.3
NetR1_1: R1.1 U3.13 | length 18.6
  Top Layer w0.2: v2(30.6,21.4) 30.7,21.5 U3.13 ; v2(39.7,9.3) 40.7,9.3 R1.1
  Int1 (GND) w0.2: v2(30.6,21.4) 30.6,18.4 v2(39.7,9.3)
NetR2_1: R2.1 U3.12 | length 22.2
  Top Layer w0.2: v2(29.8,22.3) U3.12 ; v2(39.8,7.6) 39.9,7.5 R2.1
  Int1 (GND) w0.2: v2(29.8,22.3) 29.8,17.6 v2(39.8,7.6)
NetR3_1: R3.1 U3.5 | length 20.9
  Top Layer w0.2: R3.1 29.5,12.35 v2(29.5,11.25) ; U3.5@37.8,23.329 U3.5 v2(37.8,24.9)
  Bottom Layer w0.2: v2(29.5,11.25) 29.504,11.254 31.004,11.254 33.5,13.75 33.5,18.25 37.75,22.5 v2@37.75,25
NetR5_1: R5.1 U3.22 | length 2.9
  Top Layer w0.3: R5.1 30.3,14 30.6,14.3 U3.22
PG: U2.10 U3.16 | length 18.8
  Top Layer w0.2: U2.10 16.375,14.875 v2(17.25,14) ; v2(28.5,19) 32,19 U3.16
  Bottom Layer w0.2: v2(17.25,14) 23.5,14 v2(28.5,19)
USB_N: D1.6 P1.A7 P1.B7 U3.26 | length 40.6
  Top Layer w0.182: P1.A7 3.974,17.258 3.242,17.258 3,17.5 3,18.1 3.2,18.3 3.931,18.3 P1.B7 4.04,18.191 4.651,18.191 4.688,18.154 7.028,18.154 7.474,17.709 9.8,17.709 ; D1.6 10.05,17.959 9.8,17.709 ; U3.26 33.8,11.397 33.912,11.285 33.939,11.285 34.046,11.178 34.046,10.152 33.693,9.8 18.737,9.8 18.22,10.316 18.018,10.518 14.133,14.403 14.133,16.703 14.043,16.794 13.128,17.709 9.8,17.709
USB_P: D1.1 P1.A6 P1.B6 U3.27 | length 40.4
  Top Layer w0.182: P1.B6 4.021,16.789 4.689,16.789 4.9,17 4.9,17.56 4.651,17.809 ; P1.A6 4.04,17.809 4.651,17.809 ; D1.1 10.05,17.25 9.9,17.4 ; U3.27 34.6,11.397 34.488,11.285 34.461,11.285 34.354,11.178 34.354,10.024 33.821,9.491 18.609,9.491 13.825,14.275 13.825,16.575 13,17.4 9.9,17.4 ; 4.651,17.809 4.688,17.846 6.9,17.846 7.346,17.4 9.9,17.4
VBUS: C1.2 D1.5 P1.A4B9 P1.B4A9 Q1.2 R8.2 U1.3 U2.8 | length 45.5
  Top Layer w0.5: v2@5.873,15.1 5.973,15.2 v2(6,15.2) ; D1.5 v2(11,19.8) ; v2(14.8,17.6) 14.9,17.5 U2.8
  Top Layer w0.6: P1.B4A9 v2@5.873,15.1 ; P1.A4B9 v2(5.5,19.9)
  Top Layer w1: v2(13.1,30.8) 13.1,29.4 U1.3 C1.2
  Top Layer w1.25: v2(6,15.2) 6.1,15.2 9.15,12.15 R8.2 9.15,8.285 Q1.2
  Int1 (GND) w0.5: v2@10.95,19.85 v2(11,19.8) 12.6,19.8 v2(14.8,17.6)
  Int1 (GND) w1: v2(5.5,19.9) v2@5.55,19.85 ; v2(6,15.2) 6,19.4 v2@5.55,19.85 ; v2@10.95,19.85 v2@5.55,19.85 ; v2(11,19.8) 11,28.7 v2(13.1,30.8)
Volt-div: R10.1 R11.2 U3.6 | length 32.7
  Top Layer w0.3: R10.1 20.25,7.85 v2(20.3,7.9) ; v2(36.5,25.2) 36.5,24.6 37,24.1 U3.6
  Top Layer w0.5: R11.2 R10.1
  Int1 (GND) w0.3: v2(20.3,7.9) 25.5,13.1 25.5,19.6 31.3,25.4 36.2,25.4 36.4,25.2 v2(36.5,25.2)
pads on no net: P1. P1.13 P1.14 P1.15 P1.16 P1.A8 P1.B8 SW1.2 SW1.4 SW2.2 SW2.4 U2.4 U2.5 U3.4 U3.7 U3.9 U3.10 U3.15 U3.17 U3.24 U3.25 U3.28 U3.29 U3.32 U3.33 U3.34 U3.35

## Polygon pours and split planes (outlines as drawn)
GND on Int1 (GND) "Int1 (GND)-GND" (solid, remove dead copper, pour order 1): -3.5,38.5 48,38.5 48,-3.5 -3.5,-3.5
GND on Int2 (PWR) "Int2 (PWR)-GND" (solid, remove dead copper, pour order 2): -3.5,38.5 48,38.5 48,-3.5 -3.5,-3.5
GND on Bottom Layer "Bottom Layer-GND" (solid, remove dead copper, pour order 3): -3.5,38.5 48,38.5 48,-3.5 -3.5,-3.5
GND on Top Layer "Top Layer-GND" (solid, remove dead copper, pour order 0): -3.5,38.5 48,38.5 48,-3.5 -3.5,-3.5

## Silkscreen, mask and mechanical layers (free items; w line width, h text height)
Top Overlay:
  lines w0.254: -3.509,35 cw(c0,35) 0,38.509 ; -3.5,0.249 -3.5,35 ; -3.491,0.249 ccw(c0,0) 0,-3.5 ; -0.25,-3.5 44.5,-3.5 ccw(c44.5,0) 48,0 48,35 ccw(c44.5,35) 44.5,38.5 0,38.5
  text "3.3V" at 8.65,35.65 h1
  text "EN" at 35.377,30.127 h0.8
  text "1" at 47.327,8.927 h0.6
  text "IO9" at 34.877,8.877 h0.8
  text "2" at 47.227,7.227 h0.6
  text "3.3V" at 29.127,3.623 h0.6 r270
  text "GND" at 36.877,3.123 h0.6 r270
  text "RX" at 31.627,2.623 h0.6 r270
  text "TX" at 34.127,2.623 h0.6 r270
  text "VOUT" at 9.15,-3.1 h1
  text "GND" at 15.65,-3.1 h1
Board:
  lines w0.254: -3.509,35 cw(c0,35) 0,38.509 ; -3.5,0.249 -3.5,35 ; -3.491,0.249 ccw(c0,0) 0,-3.5 ; -0.25,-3.5 44.5,-3.5 ccw(c44.5,0) 48,0 48,35 ccw(c44.5,35) 44.5,38.5 0,38.5

## Text inside footprints (layer, text, board x,y; h text height)
U3: Top Overlay "*" at 41.146,24.759 h1.27 r270; Mechanical 13 "*" at 40.765,23.057 h1.27 r270